# Allegro board demoa2 - 복사본.brd
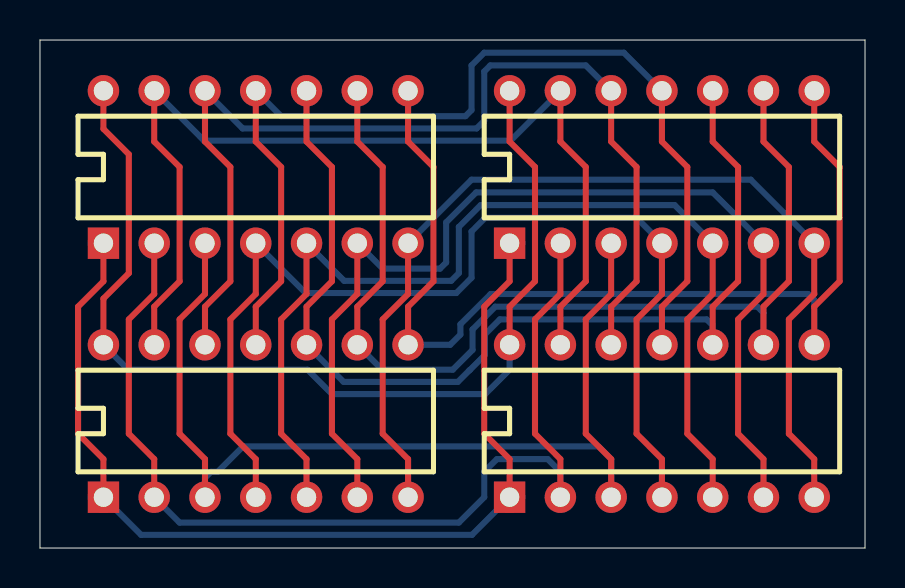
[diagram p0: board, top side]
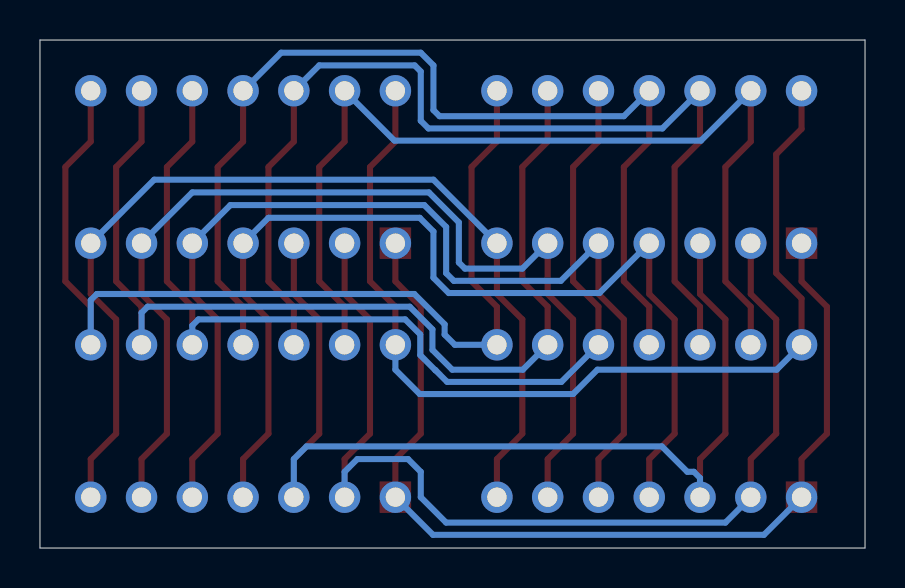
[diagram p1: board, bottom side, seen from below]

Outline 41.27 x 25.4 mm; copper layers: TOP, GND, POWER, INNER1, INNER2, BOTTOM. Coordinates in mm from the lower left corner of the outline.
Outline path: 0,25.4 0,0 41.27,0 41.27,25.4 0,25.4

## Design rules (mm)
nets with their own width: min track width 0.305; nets DAT1 DAT2 DAT3 DAT4 DAT5 DAT6 DAT7 DAT8 DAT9 DAT10 DAT11 DAT12 GND VCC

## Placement (name value [footprint] x y rotation side)
U1  7400  [DIP14]  3.17 15.24 0 top
U2  7400  [DIP14]  23.5 15.24 0 top
U3  7400  [DIP14]  3.17 2.54 0 top
U4  7400  [DIP14]  23.5 2.54 0 top

## Library data of the parts
U1-U4 = 7400

## Footprints (pads in the part's own frame, mm; a bottom-side part is the same pattern mirrored in y, then rotated)
DIP14
  rect 1.575x1.575 hole 0.965: 1(0,0)
  round 1.575 hole 0.965: 2(2.54,0) 3(5.08,0) 4(7.62,0) 5(10.16,0) 6(12.7,0) 7(15.24,0) 8(15.24,7.62) 9(12.7,7.62) 10(10.16,7.62) 11(7.62,7.62) 12(5.08,7.62) 13(2.54,7.62) 14(0,7.62)

## Nets
GND: U1.7(TP-7) U2.7(TP-7) U3.7(TP-7) U4.7(TP-7)
VCC: U1.14(TP-14) U2.14(TP-14) U3.14(TP-14) U4.14(TP-14)
DAT1: U1.2(TP-2) U2.2(TP-2) U3.2(TP-2) U4.2(TP-2)
DAT2: U1.1(TP-1) U2.1(TP-1) U3.1(TP-1) U4.1(TP-1)
DAT3: U1.3(TP-3) U2.3(TP-3) U3.3(TP-3) U4.3(TP-3)
DAT4: U1.5(TP-5) U2.5(TP-5) U3.5(TP-5) U4.5(TP-5)
DAT5: U1.4(TP-4) U2.4(TP-4) U3.4(TP-4) U4.4(TP-4)
DAT6: U1.6(TP-6) U2.6(TP-6) U3.6(TP-6) U4.6(TP-6)
DAT7: U1.10(TP-10) U2.10(TP-10) U3.10(TP-10) U4.10(TP-10)
DAT8: U1.9(TP-9) U2.9(TP-9) U3.9(TP-9) U4.9(TP-9)
DAT9: U1.8(TP-8) U2.8(TP-8) U3.8(TP-8) U4.8(TP-8)
DAT10: U1.13(TP-13) U2.13(TP-13) U3.13(TP-13) U4.13(TP-13)
DAT11: U1.12(TP-12) U2.12(TP-12) U3.12(TP-12) U4.12(TP-12)
DAT12: U1.11(TP-11) U2.11(TP-11) U3.11(TP-11) U4.11(TP-11)

## Routing (per net, layer and track width the routed paths; a pad name or vN(x,y) marks a point on that pad's centre or on a via; arc(x,y) is an arc through that point)
GND: length 50.5
  TOP w0.305: U4.7 38.73,4.45 37.46,5.71 37.46,11.43 38.73,12.7 U2.7 ; U3.7 18.42,4.45 17.15,5.71 17.15,11.43 18.42,12.7 U1.7
  BOTTOM w0.305: U1.7 21.59,18.41 35.56,18.41 U2.7
VCC: length 50.6
  TOP w0.305: U3.14 3.17,12.47 4.45,13.74 4.45,19.68 3.17,20.95 U1.14 ; U4.14 23.5,12.06 24.77,13.34 24.77,19.05 23.5,20.32 U2.14
  BOTTOM w0.305: U4.14 23.5,8.92 22.28,7.7 14.61,7.7 13.39,8.92 4.42,8.92 U3.14
DAT1: length 51.9
  TOP w0.305: U2.2 26.04,12.7 24.77,11.43 24.77,5.71 26.04,4.45 U4.2 ; U3.2 5.71,4.45 4.45,5.71 4.45,11.43 5.71,12.7 U1.2
  BOTTOM w0.305: U3.2 6.98,1.27 20.96,1.27 22.23,2.54 22.23,3.81 22.86,4.45 25.4,4.45 26.04,3.81 U4.2
DAT2: length 49.4
  TOP w0.305: U1.1 3.17,13.34 1.91,12.06 1.91,5.71 3.17,4.45 U3.1 ; U2.1 23.5,13.34 22.23,12.06 22.23,5.71 23.5,4.45 U4.1
  BOTTOM w0.305: U3.1 5.06,0.66 21.61,0.66 U4.1
DAT3: length 51.6
  TOP w0.305: U3.3 8.26,4.45 6.98,5.71 6.98,11.43 8.26,12.7 U1.3 ; U2.3 28.58,12.7 27.31,11.43 27.31,5.71 28.58,4.45 U4.3
  BOTTOM w0.305: U3.3 8.26,3.51 8.56,3.81 8.89,3.81 10.16,5.08 27.94,5.08 28.58,4.45 U4.3
DAT4: length 52.3
  TOP w0.305: U3.5 13.33,4.45 12.06,5.71 12.06,11.43 13.33,12.7 U1.5 ; U2.5 33.66,12.7 32.38,11.43 32.38,5.71 33.66,4.45 U4.5
  BOTTOM w0.305: U2.5 31.75,17.14 22.05,17.14 20.96,16.05 20.96,13.74 20.57,13.36 15.22,13.36 U1.5
DAT5: length 52.3
  TOP w0.305: U4.4 31.12,4.45 29.85,5.71 29.85,11.43 31.12,12.7 U2.4 ; U1.4 10.79,12.7 9.53,11.43 9.53,5.71 10.79,4.45 U3.4
  BOTTOM w0.305: U1.4 13.29,12.75 20.83,12.75 21.59,13.51 21.59,15.82 22.28,16.51 29.85,16.51 U2.4
DAT6: length 52.2
  TOP w0.305: U1.6 15.88,12.7 14.61,11.43 14.61,5.71 15.88,4.45 U3.6 ; U2.6 36.2,12.7 34.92,11.43 34.92,5.71 36.2,4.45 U4.6
  BOTTOM w0.305: U1.6 17.15,13.97 20.02,13.97 20.32,14.27 20.32,16.28 21.82,17.78 33.66,17.78 U2.6
DAT7: length 51.6
  TOP w0.305: U4.10 33.66,12.06 34.92,13.34 34.92,19.05 33.66,20.32 U2.10 ; U3.10 13.33,12.06 14.61,13.34 14.61,19.05 13.33,20.32 U1.10
  BOTTOM w0.305: U3.10 15.19,8.31 20.9,8.31 21.49,8.89 21.49,8.89 22.25,9.64 22.25,10.68 23,11.43 33.35,11.43 33.66,11.13 U4.10
DAT8: length 52
  TOP w0.305: U1.9 15.88,20.32 17.15,19.05 17.15,13.34 15.88,12.06 U3.9 ; U2.9 36.2,20.32 37.46,19.05 37.46,13.34 36.2,12.06 U4.9
  BOTTOM w0.305: U4.9 36.2,11.76 35.89,12.06 22.78,12.06 21.64,10.93 21.64,9.91 20.65,8.92 17.12,8.92 U3.9
DAT9: length 51.5
  TOP w0.305: U2.8 38.73,20.32 40,19.05 40,13.34 38.73,12.06 U4.8 ; U1.8 18.42,20.32 19.69,19.05 19.69,13.34 18.42,12.06 U3.8
  BOTTOM w0.305: U4.8 38.73,12.4 38.43,12.7 22.55,12.7 21.03,11.18 21.03,10.67 20.52,10.16 U3.8
DAT10: length 49.9
  TOP w0.305: U4.13 26.04,12.06 27.31,13.34 27.31,19.05 26.04,20.32 U2.13 ; U1.13 5.71,20.32 6.98,19.05 6.98,13.34 5.71,12.06 U3.13
  BOTTOM w0.305: U1.13 8.21,20.37 23.54,20.37 U2.13
DAT11: length 51.9
  TOP w0.305: U2.12 28.58,20.32 29.85,19.05 29.85,13.34 28.58,12.06 U4.12 ; U3.12 8.26,12.06 9.53,13.34 9.53,19.05 8.26,20.32 U1.12
  BOTTOM w0.305: U1.12 10.14,20.98 21.84,20.98 22.23,21.36 22.23,23.83 22.53,24.13 27.31,24.13 U2.12
DAT12: length 51.8
  TOP w0.305: U2.11 31.12,20.32 32.38,19.05 32.38,13.34 31.12,12.06 U4.11 ; U3.11 10.79,12.06 12.06,13.34 12.06,19.05 10.79,20.32 U1.11
  BOTTOM w0.305: U1.11 12.06,21.59 21.29,21.59 21.59,21.89 21.59,24.13 22.23,24.77 29.21,24.77 U2.11
